# Altium PCB pcb.PcbDoc
Units mm, origin at the board's own origin, x right, y up, seen from the top; angles counter-clockwise.
Board outline 51.69 x 27.3 mm, 2 copper layers (Top Layer, Bottom Layer); 10 components, 6 nets, 21 pads, 0 vias.
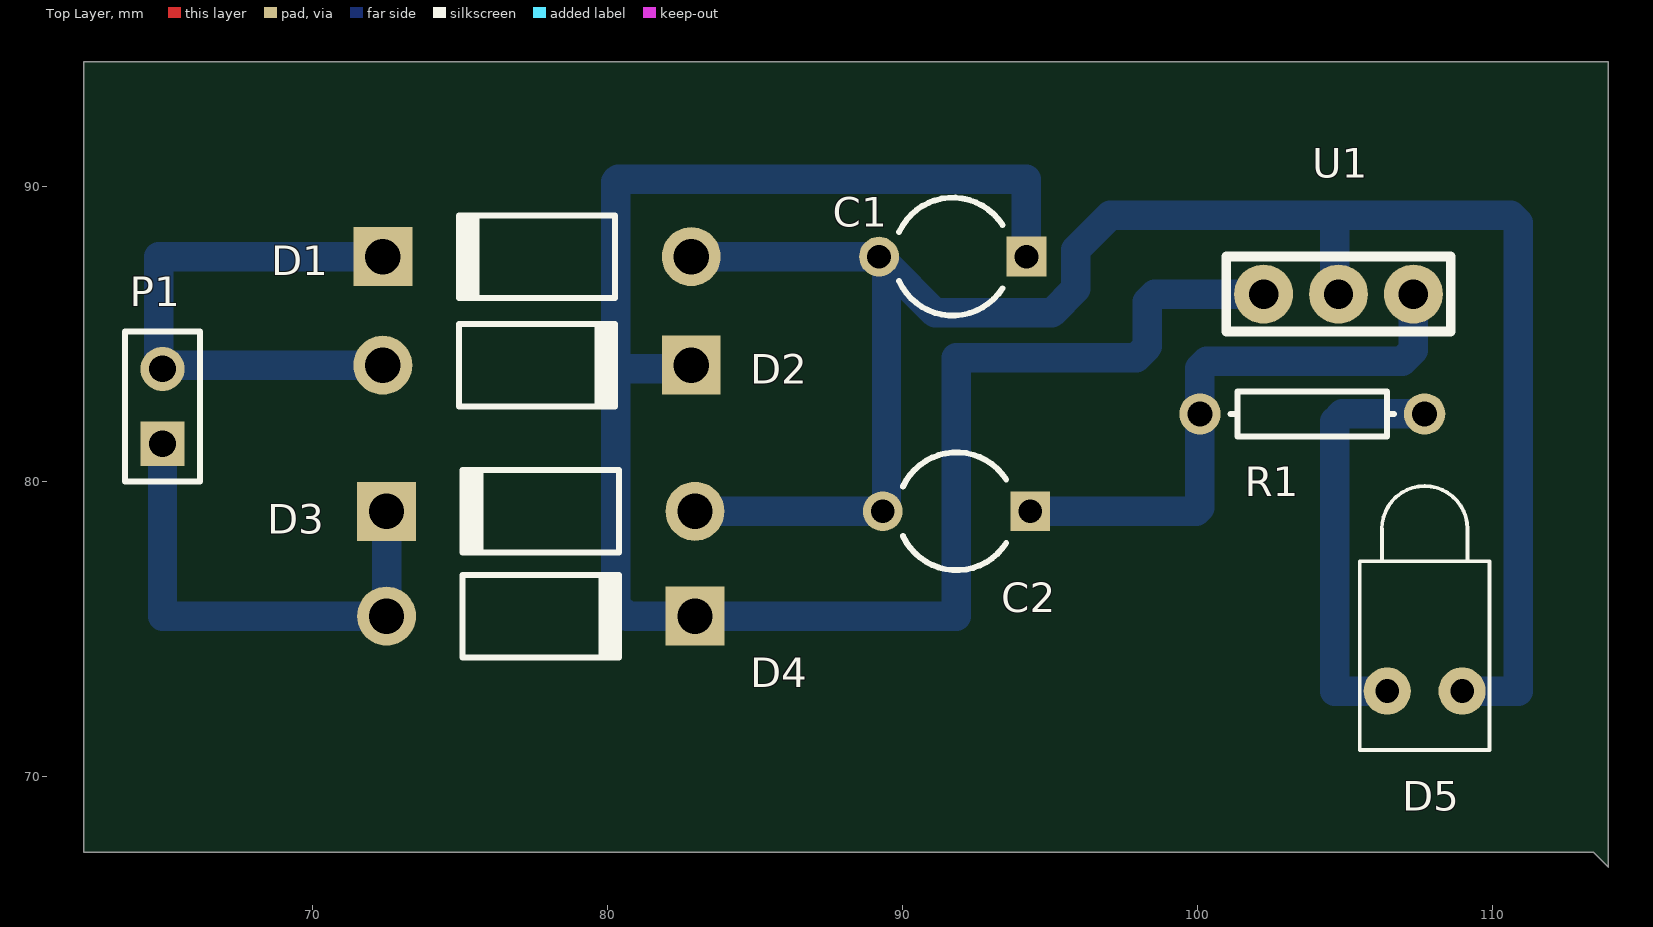
[diagram p0: Top Layer view]
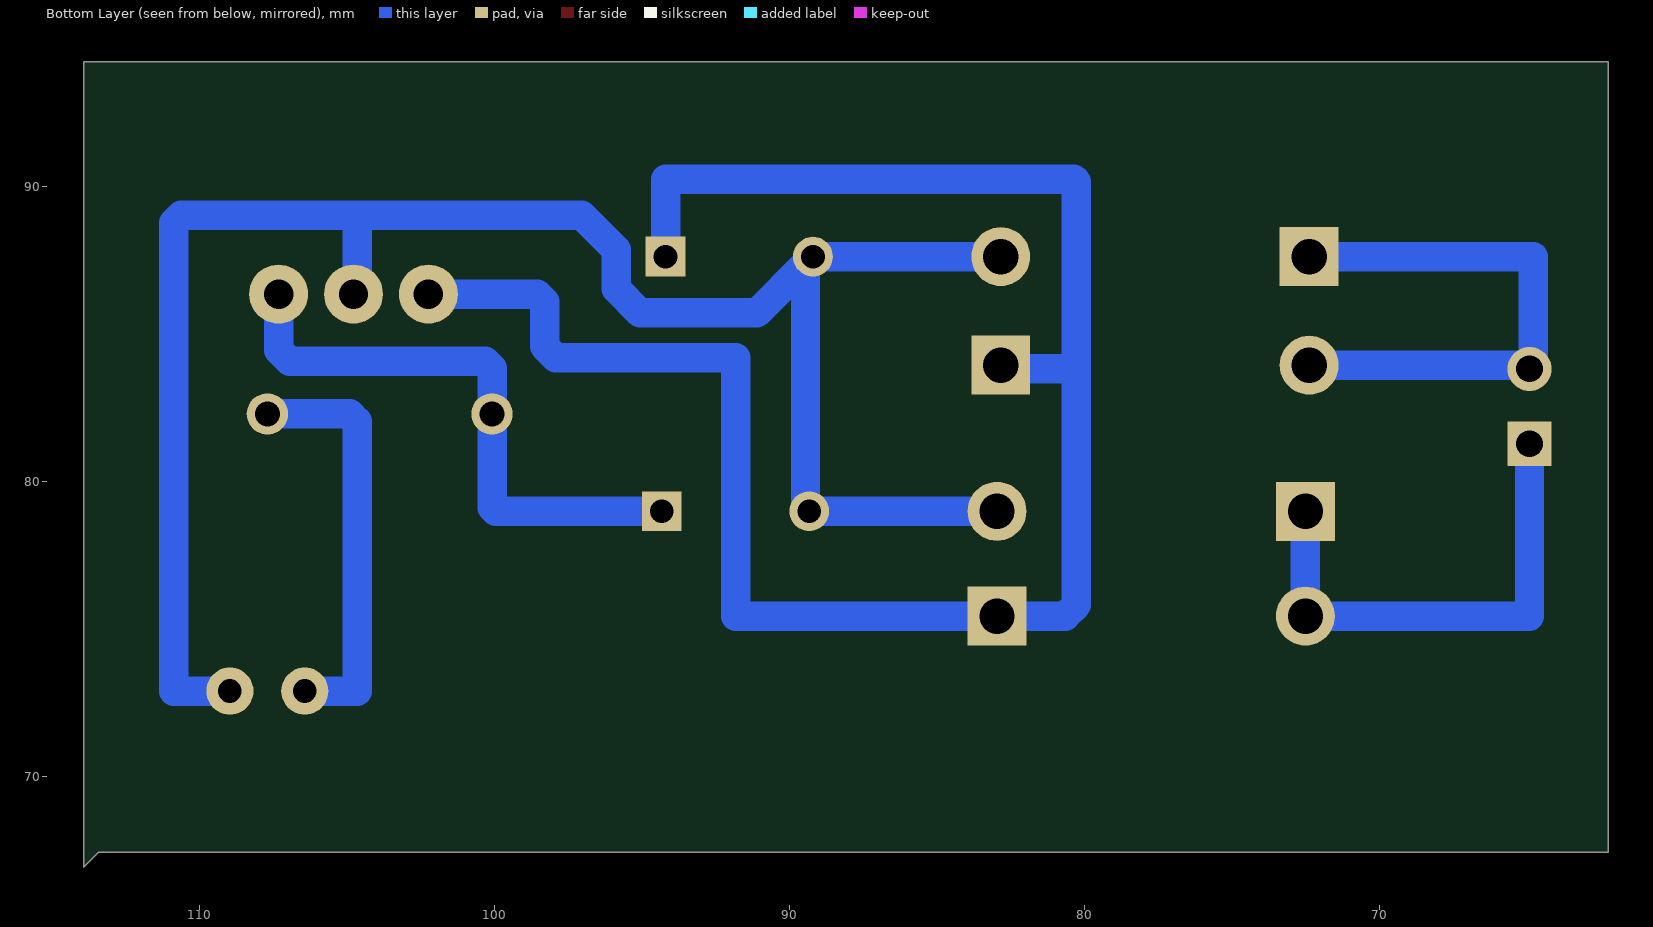
[diagram p1: Bottom Layer view, seen from below]

## Layer stack, top to bottom
Top Solder: solder mask 0.0102, Solder Resist, Dk 3.5
Top Layer: signal copper 0.0356
Dielectric 1: dielectric 0.32, FR-4, Dk 4.8
Bottom Layer: signal copper 0.0356
Bottom Solder: solder mask 0.0102, Solder Resist, Dk 3.5

## Board outline
62.23,94.234 62.23,67.437 113.411,67.437 113.919,66.929 113.919,94.234

## Design rules (kind name [scope] priority, off if disabled: settings)
Clearance [All] p1: gap=0.5 ignorepadtopadclearanceinfootprint=FALSE
PolygonConnect [All] p1: connectstyle=Relief reliefconductorwidth=0.254 reliefentries=4 polygonreliefangle="90 Angle" airgapwidth=0.254
RoutingVias [All] p1: holewidth=0.711 width=1.27 viastyle="Through Hole" minholewidth=0.711 minwidth=1.27 maxholewidth=0.711 maxwidth=1.27
SolderMaskExpansion [All] p1: expansion=0.102
Width [All] p1: maxlimit=2 minlimit=0.5 preferedwidth=1
30 further rules are at their usual default settings.

## Components (designator, comment, footprint, x,y, rotation, side; value= is the part's Value field where it differs from the comment)
C1 "Cap2" CAPR5-4X5 91.694,87.63 r180 top value=100pF
C2 "Cap2" CAPR5-4X5 91.821,78.994 r180 top value=100pF
D1 "Diode 1N4007" DO-41 77.597,87.63 r180 top
D2 "Diode 1N4007" DO-41 77.597,83.947 r0 top
D3 "Diode 1N4007" DO-41 77.724,78.994 r180 top
D4 "Diode 1N4007" DO-41 77.724,75.438 r0 top
D5 "LED1" LED-1 107.696,72.898 r90 top
P1 "Header 2" HDR1X2 64.897,81.28 r90 top
R1 "Res1" AXIAL-0.3 103.886,82.296 r180 top value=1K
U1 "LM7805" LM7805 102.235,86.36 r0 top

## Footprints (in the part's own frame and the unit in brackets; to place one, negate y for a bottom-side part, rotate by r counter-clockwise, add the part's x,y. Pads: shape width x height; smd on the part's side, far side on the other; paste and mask are expansions set on the pad)
AXIAL-0.3 [mm] "Axial Device, Thru-Hole; 2 Leads; 0.3 in Pin Spacing"
  round 1.4 hole 0.85: 1(-3.81,0) 2(3.81,0)
  silkscreen extent -2.77,-0.76 2.77,0.76
CAPR5-4X5 [mm] "Capacitor; 2 Leads"
  rect 1.35x1.35 hole 0.8: 1(-2.5,0)
  round 1.35 hole 0.8: 2(2.5,0)
  silkscreen extent -1.69,-2 1.82,2
DO-41 [mm] "Diode, Axial; Body 5.2 x 2.7 mm (LxDia. max), Lead Dia. 0.86 mm (max)"
  round 2 hole 1.2: 1(-5.23,0)
  rect 2x2 hole 1.2: 2(5.23,0)
  silkscreen extent -2.65,-1.4 2.75,1.4
HDR1X2 [mm] "Connector; Header; 2 Position"
  rect 1.5x1.5 hole 0.9: 1(0,0)
  round 1.5 hole 0.9: 2(2.54,0)
  silkscreen extent -1.27,-1.27 3.81,1.27
LED-1 [mm] "LED; 2 Leads"
  round 1.6 hole 0.8: 1(0,1.27) 2(0,-1.27)
  silkscreen extent -2,-2.2 6.95,2.2
LM7805 [mm]
  round 2 hole 1: 1(0,0) 2(2.54,0) 3(5.08,0)
  silkscreen extent -1.27,-1.27 6.35,1.27

## Part data
C1 C2: "Capacitor", PackageDescription="Capacitor; 2 Leads", PackageReference=CAPR5-4X5, Published=23-Sep-2002, Publisher="Altium Limited"
D1 D2 D3 D4: "1 Amp General Purpose Rectifier", Code_JEDEC=DO-204-AL, ComponentLink1Description="Manufacturer Link", ComponentLink1URL=http://www.fairchildsemi.com/, ComponentLink2Description=Datasheet, ComponentLink2URL=http://www.fairchildsemi.com/ds/1N%2F1N4001.pdf, DatasheetVersion=1998, LatestRevisionDate=17-Jul-2002, LatestRevisionNote="Re-released for DXP Platform.", PackageDescription="Diode, Axial; Body 5.2 x 2.7 mm (LxDia. max), Lead Dia. 0.86 mm (max)", PackageReference=DO-41, PackageVersion=Aug-1999, Published=8-Jun-2000, Publisher="Altium Limited"
D5: "Typical RED GaAs LED", LatestRevisionDate=08-Jul-2005, LatestRevisionNote="Mech Layer 1 removed.", PackageDescription="LED; 2 Leads", PackageReference=LED-1, Published=8-Jun-2000, Publisher="Altium Limited"
P1: "Header, 2-Pin", LatestRevisionDate=17-Jul-2002, LatestRevisionNote="Re-released for DXP Platform.", Publisher="Altium Limited"
R1: "Resistor", LatestRevisionDate=17-Jul-2002, LatestRevisionNote="Re-released for DXP Platform.", PackageDescription="Axial Device, Thru-Hole; 2 Leads; 0.3 in Pin Spacing", PackageReference=AXIAL-0.3, Published=8-Jun-2000, Publisher="Altium Limited"
U1: library part Component_1

## Nets (pads, with @x,y where several pads share a name; then routed paths per layer and width w, separated by ;. In a path a pad name is that pad's centre, name@x,y a point inside that pad or via, vN(x,y) a via of type N, cw(c..) or ccw(c..) an arc to the next point about the centre after c; other vN are vias at no path point)
GND: C1.2 C2.2 D1.1 D3.1 D5.2 U1.2 | length 66.5
  Bottom Layer w1: D1.1 C1.2 C1.2@89.448,87.376 ; D3.1 C2.2 89.448,79.121 C1.2@89.448,87.376 ; U1.2 104.648,86.36 104.648,89.027 ; D5.2 110.871,72.898 110.871,88.773 110.617,89.027 104.648,89.027 ; C1.2@89.448,87.376 91.099,85.725 95.053,85.725 95.869,86.541 95.869,87.868 97.028,89.027 104.648,89.027
NetC1_1: C1.1 D2.2 D4.2 U1.1 | length 66.2
  Bottom Layer w1: D2.2 82.7,83.82 80.264,83.82 ; C1.1 94.194,90.257 80.351,90.257 80.264,90.17 80.264,83.82 ; U1.1 98.552,86.36 98.298,86.106 98.298,84.582 97.917,84.201 91.821,84.201 91.821,75.438 D4.2 80.645,75.438 80.264,75.819 80.264,83.82
NetD1_2: D1.2 D2.1 P1.2 | length 19.1
  Bottom Layer w1: D2.1 64.897,83.947 P1.2 64.77,83.947 64.77,87.63 D1.2
NetD3_2: D3.2 D4.1 P1.1 | length 17
  Bottom Layer w1: P1.1 64.897,75.438 D4.1 D3.2
NetD5_1: D5.1 R1.1 | length 14.1
  Bottom Layer w1: D5.1 104.648,72.898 104.648,82.042 104.902,82.296 R1.1
VCC: C2.1 R1.2 U1.3 | length 20.1
  Bottom Layer w1: C2.1 99.949,78.994 100.076,79.121 R1.2 100.076,83.844 100.306,84.074 106.934,84.074 107.315,84.455 U1.3 U1.3@107.442,86.233